# EAGLE board ADC_Memoria (EAGLE 9.5.2)
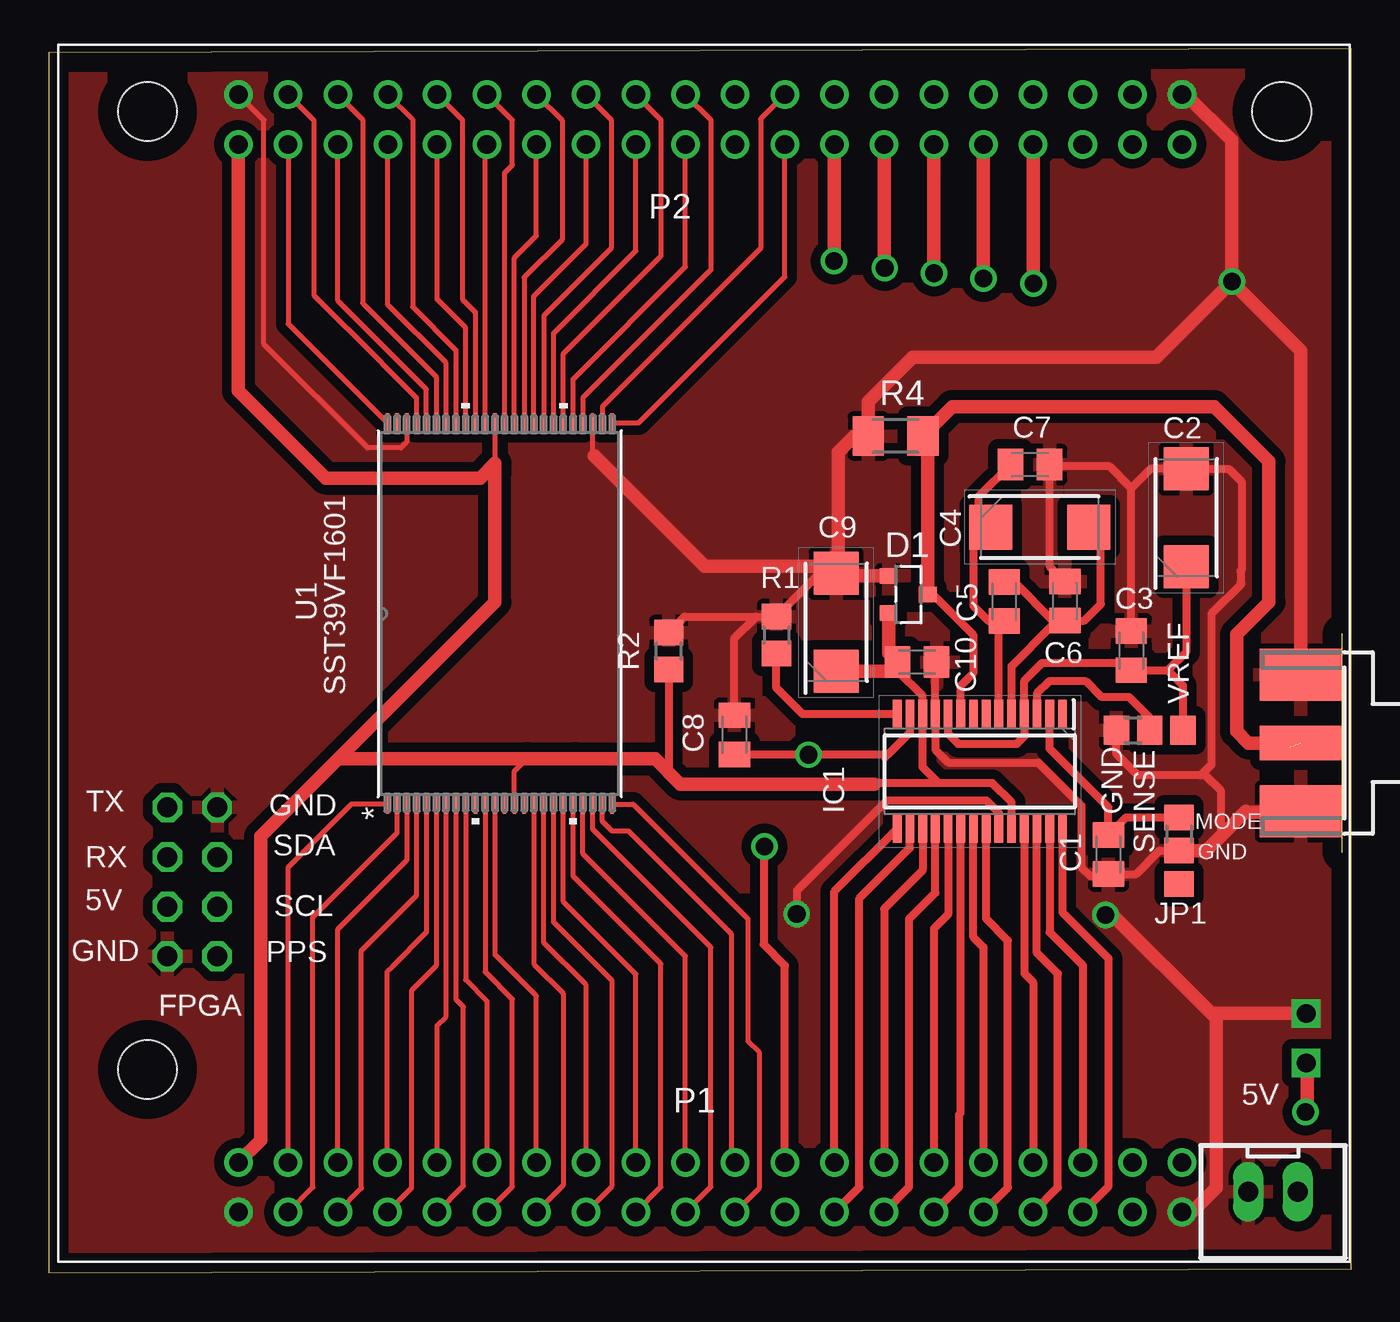
[diagram p0: board, top side]
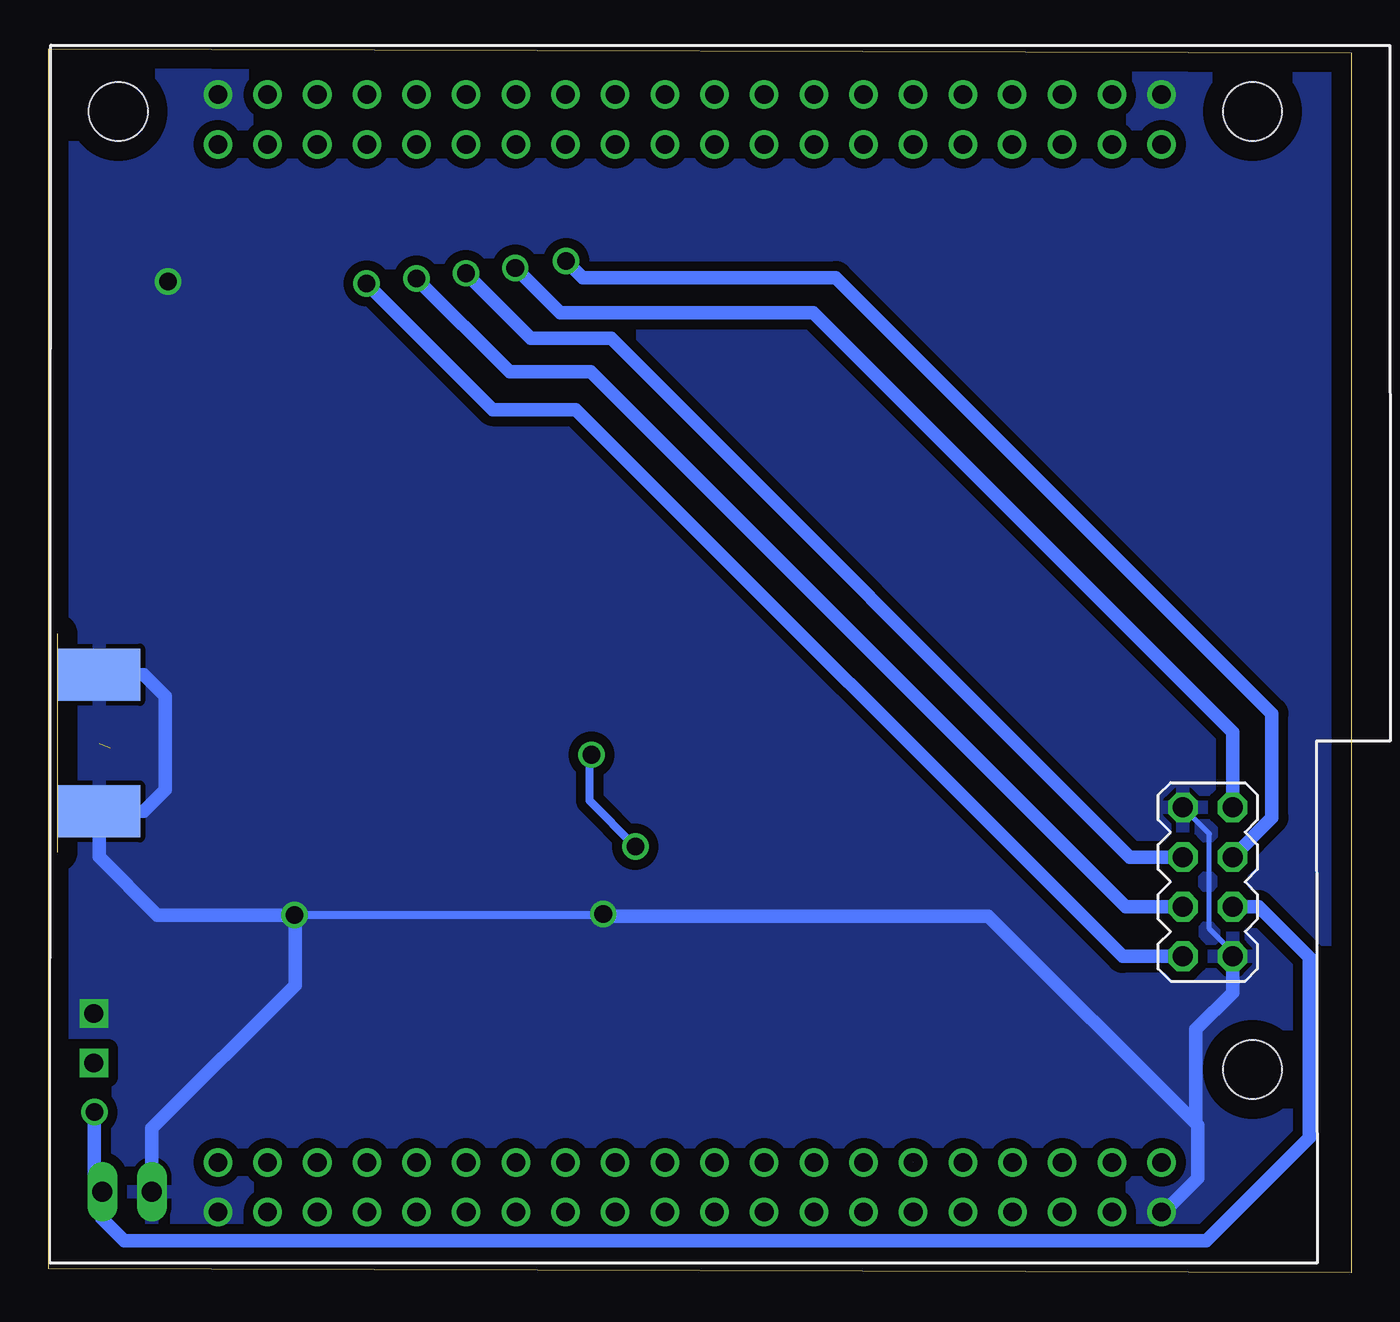
[diagram p1: board, bottom side, seen from below]

Size 66.6 x 62.6 mm. Coordinates in mm from the lower left corner, seen from the top.
Outline: 0,0 66.6,0.2 66.6,62.6 0,62.4 0,0
Copper layers (1*16): Top 0.035mm / dielectric 1.5mm / Bottom 0.035mm
Design rules "default": minimum track width 6mil, minimum drill 0.35mm, track to track 6mil, track to pad 6mil, pad to pad 6mil, via to via 6mil, smd to smd 6mil, copper to edge 40mil, drill to drill 6mil, minimum pad ring 10mil, minimum via ring 8mil, stop-mask expansion 4mil, vias tented up to drill 0mil, thermal gap 10mil

## Footprints (pad centres in the part's own frame; a part is rotated, then mirrored left to right if it is on the bottom)
C0805K = smd 1.3 x 1.6: 1 -1,0; 2 1,0
CAPPM6032X280N = smd 2.2 x 2.3: 1 -2.5,0; 2 2.5,0
PIN_DIODE_287T = smd 0.8 x 0.9: B -0.95,-1; O 0,1; T 0.95,-1
A0R-JMP = smd 1.5 x 1.3: 1 0,1.7; 2 0,0; 3 0,-1.7
SOP65P638X110-28N = smd 1.45 x 0.45: 1 -2.925,4.225; 2 -2.925,3.575; 3 -2.925,2.925; 4 -2.925,2.275; 5 -2.925,1.625; 6 -2.925,0.975; 7 -2.925,0.325; 8 -2.925,-0.325; 9 -2.925,-0.975; 10 -2.925,-1.625; 11 -2.925,-2.275; 12 -2.925,-2.925; 13 -2.925,-3.575; 14 -2.925,-4.225; 15 2.925,-4.225; 16 2.925,-3.575; 17 2.925,-2.925; 18 2.925,-2.275; 19 2.925,-1.625; 20 2.925,-0.975; 21 2.925,-0.325; 22 2.925,0.325; 23 2.925,0.975; 24 2.925,1.625; 25 2.925,2.275; 26 2.925,2.925; 27 2.925,3.575; 28 2.925,4.225
R0805 = smd 1.3 x 1.5: 1 -0.95,0; 2 0.95,0
M1206 = smd 1.6 x 2: 1 -1.4,0; 2 1.4,0
J502-ND-142-0711-821/826 = smd 4.191 x 1.778: 1 2.115,0 | smd 4.191 x 2.667: G@1 2.115,3.495; G@2 2.115,-3.495 | smd 4.191 x 2.667 bottom: G@3 2.115,3.495; G@4 2.115,-3.495
TSOP48_EKE_SST-L = smd 1.003 x 0.178: 1 -9.747,5.75; 2 -9.747,5.25; 3 -9.747,4.75; 4 -9.747,4.25; 5 -9.747,3.75; 6 -9.747,3.25; 7 -9.747,2.75; 8 -9.747,2.25; 9 -9.747,1.75; 10 -9.747,1.25; 11 -9.747,0.75; 12 -9.747,0.25; 13 -9.747,-0.25; 14 -9.747,-0.75; 15 -9.747,-1.25; 16 -9.747,-1.75; 17 -9.747,-2.25; 18 -9.747,-2.75; 19 -9.747,-3.25; 20 -9.747,-3.75; 21 -9.747,-4.25; 22 -9.747,-4.75; 23 -9.747,-5.25; 24 -9.747,-5.75; 25 9.747,-5.75; 26 9.747,-5.25; 27 9.747,-4.75; 28 9.747,-4.25; 29 9.747,-3.75; 30 9.747,-3.25; 31 9.747,-2.75; 32 9.747,-2.25; 33 9.747,-1.75; 34 9.747,-1.25; 35 9.747,-0.75; 36 9.747,-0.25; 37 9.747,0.25; 38 9.747,0.75; 39 9.747,1.25; 40 9.747,1.75; 41 9.747,2.25; 42 9.747,2.75; 43 9.747,3.25; 44 9.747,3.75; 45 9.747,4.25; 46 9.747,4.75; 47 9.747,5.25; 48 9.747,5.75
SPARTAN_NO_HOLES = drill 0.95 pad 1.3 square: 5V_E 60.325,-48.26; GND_E 60.325,-45.72 | drill 0.95 pad 1.3: P1_03 51.435,-53.34; P1_04 51.435,-55.88; P1_05 48.895,-53.34; P1_06 48.895,-55.88; P1_07 46.355,-53.34; P1_08 46.355,-55.88; P1_09 43.815,-53.34; P1_10 43.815,-55.88; P1_11 41.275,-53.34; P1_12 41.275,-55.88; P1_13 38.735,-53.34; P1_14 38.735,-55.88; P1_15 36.195,-53.34; P1_16 36.195,-55.88; P1_17 33.655,-53.34; P1_18 33.655,-55.88; P1_19 31.115,-53.34; P1_20 31.115,-55.88; P1_21 28.575,-53.34; P1_22 28.575,-55.88; P1_23 26.035,-53.34; P1_24 26.035,-55.88; P1_25 23.495,-53.34; P1_26 23.495,-55.88; P1_27 20.955,-53.34; P1_28 20.955,-55.88; P1_29 18.415,-53.34; P1_30 18.415,-55.88; P1_31 15.875,-53.34; P1_32 15.875,-55.88; P1_33 13.335,-53.34; P1_34 13.335,-55.88; P1_35 10.795,-53.34; P1_36 10.795,-55.88; P1_37 8.255,-53.34; P1_38 8.255,-55.88; P1_GND 53.975,-55.88; P1_GND1 5.715,-55.88; P1_VCC 53.975,-53.34; P1_VCC1 5.715,-53.34; P2_03 51.435,1.27; P2_04 51.435,-1.27; P2_05 48.895,1.27; P2_06 48.895,-1.27; P2_07 46.355,1.27; P2_08 46.355,-1.27; P2_09 43.815,1.27; P2_10 43.815,-1.27; P2_11 41.275,1.27; P2_12 41.275,-1.27; P2_13 38.735,1.27; P2_14 38.735,-1.27; P2_15 36.195,1.27; P2_16 36.195,-1.27; P2_17 33.655,1.27; P2_18 33.655,-1.27; P2_21 28.575,1.27; P2_22 28.575,-1.27; P2_23 26.035,1.27; P2_24 26.035,-1.27; P2_25 23.495,1.27; P2_26 23.495,-1.27; P2_27 20.955,1.27; P2_28 20.955,-1.27; P2_29 18.415,1.27; P2_30 18.415,-1.27; P2_31 15.875,1.27; P2_32 15.875,-1.27; P2_33 13.355,1.27; P2_34 13.355,-1.27; P2_35 10.795,1.27; P2_36 10.795,-1.27; P2_37 8.255,1.27; P2_38 8.255,-1.27; P2_GND 53.975,1.27; P2_GND1 5.715,1.27; P2_GND19 31.115,1.27; P2_GND20 31.115,-1.27; P2_VCC 53.975,-1.27; P2_VCC1 5.715,-1.27
CAPA1 = drill 1.016 octagon: 5V 60.738,18.927; GND 58.198,24.007; GND2 60.738,16.387; PPS 58.198,16.387; RX2PI 60.738,21.467; SCL 58.198,18.927; SDA 58.198,21.467; TX2PI 60.738,24.007 | hole 3: 61.75,10.6; 61.75,59.6; 3.75,59.6
JST-XH-02-PACKAGE-LONG-PAD = drill 1.016 long: 1 -1.27,0; 2 1.27,0

## Placement (x,y rotation side)
C1  0.1uF  [C0805K]  54.19,21.4 270 top
C2  10uF  [CAPPM6032X280N]  58.16,38.62 90 top
C3  0.1uF  [C0805K]  55.36,31.82 90 top
C4  10uF  [CAPPM6032X280N]  50.68,38.14 0 top
C5  0.1uF  [C0805K]  48.86,34.34 90 top
C6  0.1uF  [C0805K]  51.96,34.36 90 top
C7  0.1uF  [C0805K]  50.18,41.34 0 top
C8  15pF  [C0805K]  35.06,27.52 90 top
C9  10uF  [CAPPM6032X280N]  40.26,33.27 90 top
C10  0.1uF  [C0805K]  44.4,31.24 0 top
D1  PIN_DIODE_287T  [PIN_DIODE_287T]  43.95,34.7 270 top
GND-SEN-VREF  JP2  [A0R-JMP]  56.3,27.75 90 top
IC1  AD9235  [SOP65P638X110-28N]  47.61,25.65 270 top
JP1  GND MODE  [A0R-JMP]  57.8,21.6 0 top
R1  5k  [R0805]  37.21,32.62 270 top
R2  10k  [R0805]  31.7,31.8 90 top
R4  50  [M1206]  43.3,42.8 0 top
SMA  SIGNAL  [J502-ND-142-0711-821/826]  66.15,27.1 180 top
U1  SST39VF1601  [TSOP48_EKE_SST-L]  23.06,33.72 90 top
U$1  SPARTAN_NO_HOLES  [SPARTAN_NO_HOLES]  3.98,58.99 0 top
U$2  CAPA1  [CAPA1]  66.8,-0.2 0 bottom
V_EXT  V_Ext  [JST-XH-02-PACKAGE-LONG-PAD]  62.6,4.15 180 top

## Library data of the parts
C1 C3 C5-C8 C10 = rcl; SPICEPREFIX: C
C2 C4 C9 = TAN_Capacitor_2312_10UF; DESCRIPTION: Tantalum Capacitors - Solid SMD 35V 10uF 10% 2312 ESR = 1 Ohms; HEIGHT: 2.8mm; MANUFACTURER_NAME: AVX; MANUFACTURER_PART_NUMBER: TAJC106K035RNJV; MOUSER_PART_NUMBER: 581-TAJC106K035RNJV; MOUSER_PRICE-STOCK: https://www.mouser.com/Search/Refine.aspx?Keyword=581-TAJC106K035RNJV
D1 = PIN_DIODE_287T
GND-SEN-VREF JP1 = jump-0r-smd
IC1 = AD9235BRUZ-65; DESCRIPTION: AD9235BRUZ-65, 12 bit ADC Differential,, Parallel, 28-Pin TSSOP; HEIGHT: 1.1mm; MANUFACTURER_NAME: Analog Devices; MANUFACTURER_PART_NUMBER: AD9235BRUZ-65; MOUSER_PART_NUMBER: 584-AD9235BRUZ-65; MOUSER_PRICE-STOCK: https://www.mouser.com/Search/Refine.aspx?Keyword=584-AD9235BRUZ-65
R1 R2 R4 = rcl; SPICEPREFIX: R
SMA = con-coax; MF: JOHNSON COMPONENTS; MPN: 142-0711-821; OC_FARNELL: 1019328; OC_NEWARK: 16F3627
U1 = Memoria_SST39VF1601C; BUILT_BY: EMA_UL_Team; MANUFACTURER_PART_NUMBER: sst39vf1601-70-4c-eke; VENDOR: Microchip
U$1 = SPARTAN_6_NIMAS
U$2 = CAPA1
V_EXT = Connectors JST XH

## Nets
5V: U$1.5V_E U$2.5V V_EXT.1
A0: U1.25 U$1.P2_18
A1: U1.24 U$1.P1_20
A2: U1.23 U$1.P1_19
A3: U1.22 U$1.P1_22
A4: U1.21 U$1.P1_21
A5: U1.20 U$1.P1_24
A6: U1.19 U$1.P1_23
A7: U1.18 U$1.P1_26
A8: U1.8 U$1.P1_32
A9: U1.7 U$1.P1_31
A10: U1.6 U$1.P1_34
A11: U1.5 U$1.P1_33
A12: U1.4 U$1.P1_36
A13: U1.3 U$1.P1_35
A14: U1.2 U$1.P1_38
A15: U1.1 U$1.P1_37
A16: U1.48 U$1.P2_38
A17: U1.17 U$1.P1_25
A18: U1.16 U$1.P1_28
A19: U1.9 U$1.P1_29
AVDD: C9.1 C10.1 D1.T IC1.12 IC1.24 R2.1 U1.14 U1.37 U$1.P1_VCC1 U$1.P2_VCC1
CE: U1.26 U$1.P2_17
CLK: C8.1 IC1.13 U$1.P1_17
D0: IC1.15 U$1.P1_15
D1: IC1.16 U$1.P1_16
D2: IC1.17 U$1.P1_13
D3: IC1.18 U$1.P1_14
D4: IC1.19 U$1.P1_11
D5: IC1.20 U$1.P1_12
D6: IC1.21 U$1.P1_09
D7: IC1.22 U$1.P1_10
D8: IC1.25 U$1.P1_07
D9: IC1.26 U$1.P1_08
D10: IC1.27 U$1.P1_05
D11: IC1.28 U$1.P1_06
DQ0: U1.29 U$1.P2_22
DQ1: U1.31 U$1.P2_24
DQ2: U1.33 U$1.P2_26
DQ3: U1.35 U$1.P2_28
DQ4: U1.38 U$1.P2_30
DQ5: U1.40 U$1.P2_32
DQ6: U1.42 U$1.P2_34
DQ7: U1.44 U$1.P2_36
DQ8: U1.30 U$1.P2_23
DQ9: U1.32 U$1.P2_25
DQ10: U1.34 U$1.P2_27
DQ11: U1.36 U$1.P2_29
DQ12: U1.39 U$1.P2_31
DQ13: U1.41 U$1.P2_33
DQ14: U1.43 U$1.P2_35
DQ15: U1.45 U$1.P2_37
GND: C1.2 C2.2 C3.2 C6.2 C7.2 C8.2 C9.2 C10.2 D1.B GND-SEN-VREF.1 IC1.11 IC1.23 JP1.2 R1.1 R2.2 R4.1 SMA.G@1 SMA.G@2 SMA.G@3 SMA.G@4 U1.27 U1.46 U$1.GND_E U$1.P1_GND U$1.P1_GND1 U$1.P2_GND U$1.P2_GND1 U$2.GND U$2.GND2 V_EXT.2
MODE: C1.1 IC1.2 JP1.1
N$1: IC1.7
N$2: IC1.8
N$5: U$1.P1_03
N$13: IC1.14 R1.2
N$18: U$1.P1_04
OE: U1.28 U$1.P2_21
PPS: U$1.P2_08 U$2.PPS
REFB: C4.2 C5.2 C6.1 IC1.5
REFT: C4.1 C5.1 C7.1 IC1.6
RST: U1.12 U$1.P1_27
RX: U$1.P2_16 U$2.RX2PI
SCL: U$1.P2_10 U$2.SCL
SDA: U$1.P2_12 U$2.SDA
SENSE: GND-SEN-VREF.2 IC1.3
TX: U$1.P2_14 U$2.TX2PI
VIN: D1.O IC1.9 R4.2 SMA.1
VREF: C2.1 C3.1 GND-SEN-VREF.3 IC1.4 IC1.10
WE: U1.11 U$1.P1_30

## Tracks (layer width: path | path; a pad name or v marks a point on that pad's centre or on a via)
5V  (via drill 0.9)
  Top 0.7: U$1.5V_E 64.36,10.68 64.36,8.26 64.3,8.2 v64.28,8.23
  Bottom 0.7: U$2.5V 4.73,18.73 2.15,16.15 2.15,6.9 7.4,1.65 62.75,1.65 63.9,2.8 63.87,2.83 V_EXT.1 64.28,4.55 v64.28,8.23
A0
  Top 0.25: U1.25 30.17,43.47 37.63,50.93 U$1.P2_18
A1
  Top 0.25: U1.24 29.88,23.97 35.75,18.1 35.75,11.85 36.35,11.25 36.35,4.37 U$1.P1_20
A2
  Top 0.25: U$1.P1_19 34.89,5.85 34.89,17.36 29.65,22.6 28.8,22.6 28.31,23.09 U1.23
A3
  Top 0.25: U$1.P1_22 33.85,4.41 33.85,16.65 27.81,22.69 U1.22
A4
  Top 0.25: U$1.P1_21 32.55,16.2 27.31,21.44 U1.21
A5
  Top 0.25: U$1.P1_24 31.3,4.39 31.3,15.8 26.81,20.29 U1.20
A6
  Top 0.25: U$1.P1_23 30.01,15.29 26.31,18.99 U1.19
A7
  Top 0.25: U$1.P1_26 28.8,4.43 28.8,14.95 25.81,17.94 U1.18
A8
  Top 0.25: U1.8 20.81,13.99 21.2,13.6 21.2,4.46 U$1.P1_32
A9
  Top 0.25: U1.7 20.31,13.11 19.85,12.66 U$1.P1_31
A10
  Top 0.25: U1.6 19.81,15.71 18.55,14.45 18.55,4.35 U$1.P1_34
A11
  Top 0.25: U1.5 19.31,17.41 17.55,15.65 17.31,15.41 U$1.P1_33
A12
  Top 0.25: U1.4 18.81,19.31 15.98,16.48 15.98,4.35 15.98,4.32 U$1.P1_36
A13
  Top 0.25: U1.3 18.31,21.11 14.78,17.57 U$1.P1_35
A14
  Top 0.25: U1.2 17.81,22.51 13.5,18.2 13.5,4.38 U$1.P1_38
A15
  Top 0.25: U1.1 15.47,23.97 12.24,20.73 U$1.P1_37
A16
  Top 0.25: U1.48 12.24,48.54 U$1.P2_38
A17
  Top 0.25: U$1.P1_25 27.47,14.73 25.31,16.89 U1.17
A18
  Top 0.25: U$1.P1_28 26.3,4.47 26.3,14.3 24.81,15.79 U1.16
A19  (1 unrouted)
  Top 0.25: U1.9 21.31,14.99 22.4,13.9 U$1.P1_29
AVDD
  Top 0.25: 26.4,26.3 25.1,26.3 | U1.14 23.81,25.66 24.45,26.3 | U1.37 22.81,40.9
  Top 0.4: 43.02,31.62 C10.1 43.4,30.8 44.68,29.52 IC1.12 44.68,25.87 45.5,25.05 | IC1.24 49.23,24.07 48.25,25.05 45.5,25.05 | 42.2,25 42.25,25.05 45.5,25.05 | 26.9,26.3 26.4,26.3 | 10.9,9.85 10.83,9.78 10.83,21.85 | 14.8,26.3 14.65,26.15 | R2.1 31.7,25.6 32.27,25.03
  Top 0.7: 42.2,25 32.3,25 32.27,25.03 31,26.3 26.9,26.3 24.45,26.3 14.8,26.3 22.81,34.31 22.81,40.9 22.81,41.41 22.05,40.65 14.15,40.65 9.7,45.1 U$1.P2_VCC1 | 14.65,26.15 10.83,22.32 10.83,21.85 10.83,6.78 U$1.P1_VCC1 | D1.T 42.95,31.69 C10.1 42.93,30.77 C9.1
CE
  Top 0.25: U$1.P2_17 36.4,59.02 36.4,52.4 28.31,44.31 U1.26
CLK  (via drill 0.9 pad 1.2)
  Top 0.4: IC1.13 44.03,27.64 42.9,26.5 | 42.9,26.5 42.76,26.36 | 42.9,26.5 v38.85,26.5 35.08,26.5 C8.1 | v36.6,21.8 36.55,21.75 36.55,16.8 37.63,15.71 U$1.P1_17
  Bottom 0.4: v36.6,21.8 38.95,24.15 38.95,26.55 38.9,26.55 v38.85,26.5
D0
  Top 0.4: IC1.15 40.17,19.52 U$1.P1_15
D1
  Top 0.4: IC1.16 44.03,21.73 41.45,19.15 41.45,4.38 U$1.P1_16
D2
  Top 0.4: IC1.17 44.68,20.59 42.71,18.62 U$1.P1_13
D3
  Top 0.4: IC1.18 45.34,19.44 44,18.1 44,4.39 U$1.P1_14
D4
  Top 0.4: IC1.19 45.98,18.34 45.25,17.61 U$1.P1_11
D5
  Top 0.4: IC1.20 46.63,8.19 46.55,8.1 46.55,4.41 U$1.P1_12
D6
  Top 0.4: IC1.21 47.28,17.16 47.8,16.66 U$1.P1_09
D7
  Top 0.4: IC1.22 47.93,18.12 49.05,17 49.05,4.37 U$1.P1_10
D8
  Top 0.4: IC1.25 49.88,15.32 50.34,14.87 U$1.P1_07
D9
  Top 0.4: IC1.26 50.53,16.37 51.6,15.3 51.6,4.38 U$1.P1_08
D10
  Top 0.4: IC1.27 51.18,17.41 52.88,15.73 U$1.P1_05
D11
  Top 0.4: IC1.28 51.84,18.44 54.2,16.08 54.2,4.43 U$1.P1_06
DQ0
  Top 0.25: U1.29 26.81,45.71 32.55,51.45 U$1.P2_22
DQ1
  Top 0.25: U1.31 25.81,48.06 30.01,52.27 U$1.P2_24
DQ2
  Top 0.25: U1.33 24.81,49.96 27.47,52.62 U$1.P2_26
DQ3
  Top 0.25: U1.35 23.81,51.91 24.93,53.03 U$1.P2_28
DQ4
  Top 0.25: U1.38 22.31,57.63 U$1.P2_30
DQ5
  Top 0.25: U1.40 21.31,48.34 19.85,49.79 U$1.P2_32
DQ6
  Top 0.25: U1.42 20.31,46.54 17.33,49.52 U$1.P2_34
DQ7
  Top 0.25: U1.44 19.31,45.19 14.78,49.72 U$1.P2_36
DQ8
  Top 0.25: U1.30 26.31,47.01 31.3,52 31.3,58.97 U$1.P2_23
DQ9
  Top 0.25: U$1.P2_25 28.75,58.98 28.75,52.4 25.31,48.96 U1.32
DQ10
  Top 0.25: U$1.P2_27 26.25,58.95 26.25,52.85 24.31,50.91 U1.34
DQ11
  Top 0.25: U$1.P2_29 23.7,58.95 23.7,56.65 23.31,56.26 U1.36
DQ12
  Top 0.25: U1.39 21.81,49.14 21.15,49.8 21.15,58.96 U$1.P2_31
DQ13
  Top 0.25: U1.41 20.81,47.19 18.6,49.4 18.6,58.99 U$1.P2_33
DQ14
  Top 0.25: U$1.P2_35 16.05,58.98 16.05,49.6 19.81,45.84 U1.43
DQ15
  Top 0.25: U1.45 18.81,44.74 15.28,48.27 15.2,48.35 13.55,50 13.55,58.95 U$1.P2_37
GND  (via drill 0.9, 0.9 pad 1.2)
  Top 0.25: U1.46 18.31,42.51 18,42.2 16.3,42.2 11,47.5 11,58.95 U$1.P2_GND1 | 27.9,41.8 27.81,41.89 U1.27
  Top 0.4: C6.2 51.2,36.12 51.2,41.2 | C7.2 51.2,41.32 51.2,41.2 | 58.65,41.12 C2.2 | C8.2 35.06,32.46 36.17,33.57 R1.1 | 36.57,33.57 R1.1 | IC1.23 48.59,23.52 47.96,24.15 42.85,24.15 38.25,19.55 v38.25,18.35 | C10.2 45.34,31.18 IC1.11 45.34,26.77 46,26.1 50.6,26.1 52.8,23.9 52.8,20.75 53.25,20.3 54.35,20.3 54.45,20.4 | C3.2 55.36,40.14 | 55.36,40.14 54.25,41.25 51.25,41.25 51.2,41.2 | 54.25,20.4 C1.2 54.45,20.4 | 54.45,20.4 55.6,20.4 56.8,21.6 JP1.2 | 58.9,25.45 59.15,25.45 59.95,24.65 59.95,22.35 60.07,22.48 | 58.9,25.45 55.7,25.45 54.6,26.55 GND-SEN-VREF.1 | 32.47,33.52 R2.2 32.52,33.57 R1.1 | SMA.G@1 61.2,23.61 | C2.2 56.34,41.12 55.36,40.14 | C2.2 60.33,41.12 61,40.45 61,35.95 60.95,35.9 60.95,35.3 61,35.25 59.45,33.7 59.45,26 58.9,25.45 | R1.1 39.29,35.65 40.38,35.65
  Top 0.7: U$1.P1_GND 58.46,3.11 59.7,4.35 59.7,13.02 59.45,13.27 | U$1.P2_GND 58.16,60.26 60.5,57.91 v60.5,50.7 | U$1.GND_E 59.45,13.27 | 59.45,13.27 54.42,18.3 v54.04,18.3 54.04,18.23 54.19,18.38 | v60.5,50.7 56.63,46.83 44.18,46.83 41.9,44.55 R4.1 41.2,42.8 40.38,41.98 40.38,36 | SMA.G@1 64.7,23.61 64.75,23.55 61.26,23.55 61.2,23.61 60.07,22.48 | JP1.2 59.2,21.6 59.95,22.35 | SMA.G@2 64.04,47.16 v60.5,50.7 | D1.B 40.38,35.65 | 40.38,35.65 C9.2 | 40.38,35.65 40.38,36 | 40.38,36 40.23,36.15 33.55,36.15 27.9,41.8
  Bottom 0.25: U$2.GND2 6.25,16.38 6.25,16.61 7.25,17.61 7.25,22.46 U$2.GND
  Bottom 0.4: v38.25,18.35 38.2,18.3 | 38.2,18.3 38.15,18.25 | 38.2,18.3 54,18.3 v54.04,18.3 54.1,18.3 | 63.55,30.6 SMA.G@2
  Bottom 0.7: 7.95,7.65 7.95,12.45 6.06,14.34 U$2.GND2 | 38.15,18.25 18.55,18.25 7.95,7.65 | 7.95,7.65 7.85,7.55 7.85,4.85 9.59,3.11 U$1.P1_GND1 | 64.55,23.65 64.78,23.42 64.78,23.28 | 54,18.3 54,14.72 61.33,7.39 V_EXT.2 | 63.55,30.6 61.74,30.6 60.65,29.5 60.65,24.7 61.74,23.61 SMA.G@1 64.04,21.29 61.05,18.3 v54.04,18.3
  pour Top (isolate 0.5): 0.3,62.9 66.45,62.9 66.45,0.2 0.4,0.2 0.3,0.3
  pour Bottom (isolate 0.5): 0,62.45 66.45,62.55 66.45,0.2 0.15,0.2 0.15,62.45
MODE
  Top 0.4: JP1.1 55.09,23.3 C1.1 54.19,23.81 51.18,26.82 IC1.2
N$13
  Top 0.4: IC1.14 39.35,28.57 39.12,28.57 38.55,28.57 37.21,29.91 R1.2
OE
  Top 0.25: U$1.P2_21 33.85,58.96 33.85,51.3 27.31,44.76 U1.28
PPS  (via drill 0.9)
  Top 0.7: U$1.P2_08 50.34,50.61 v50.35,50.6 50.32,50.57
  Bottom 0.7: U$2.PPS 11.69,16.19 39.65,44.15 40.75,44.15 43.9,44.15 v50.35,50.6
REFB
  Top 0.4: 49.28,35.34 C5.2 49.36,35.34 51.34,33.36 C6.1 | 51.96,33.1 51.96,33.06 51.8,32.9 | 51.96,33.1 C6.1 | C6.1 52.96,33.36 53.8,34.2 53.8,37.25 53.8,37.52 | 53.8,37.52 53.8,38 | 51.96,33.1 51.3,33.1 49.23,31.04 IC1.5 | C4.2 53.8,37.52
REFT
  Top 0.4: IC1.6 48.59,33.06 C5.1 48.06,33.34 47.3,34.1 47.3,37.9 47.54,38.14 | 47.54,38.14 C4.1 | C7.1 47.54,39.7 47.54,38.14
RST
  Top 0.25: U1.12 22.81,16.29 24.93,14.17 U$1.P1_27
RX  (via drill 0.9)
  Top 0.7: U$1.P2_16 40.17,51.77 v40.15,51.75
  Bottom 0.7: U$2.RX2PI 4.05,23.28 4.05,28.6 26.35,50.9 39.3,50.9 v40.15,51.75
SCL  (via drill 0.9)
  Top 0.7: U$1.P2_10 47.8,50.9 v47.8,50.85
  Bottom 0.7: U$2.SCL 11.53,18.73 38.88,46.07 43.02,46.07 v47.8,50.85
SDA  (via drill 0.9)
  Top 0.7: U$1.P2_12 45.25,51.2 45.3,51.15 v45.27,51.12
  Bottom 0.7: U$2.SDA 11.32,21.27 37.85,47.8 41.95,47.8 v45.27,51.12
SENSE
  Top 0.4: IC1.3 50.53,29.64 51.15,30.25 53.05,30.25 53.85,29.45 55.25,29.45 56.3,28.4 GND-SEN-VREF.2
TX  (via drill 0.9)
  Top 0.7: U$1.P2_14 42.71,51.58 42.8,51.5 42.8,51.45 v42.75,51.4
  Bottom 0.7: U$2.TX2PI 6.06,27.66 27.5,49.1 40.45,49.1 v42.75,51.4
VIN  (1 unrouted)
  Top 0.4: IC1.9 46.63,30.04 47.3,30.7 47.3,32.6 45.2,34.7 D1.O
  Top 0.7: 63.4,26.9 63.45,26.85 | D1.O 44.94,42.56 R4.2 46.2,44.3 59.6,44.3 62.4,41.5 62.4,34.3 60.75,32.65 60.75,27.7 61.35,27.1 SMA.1
VREF
  Top 0.4: C2.1 58.33,35.95 | 57.91,36.37 C2.1 | IC1.10 45.98,27.57 46.5,27.05 49.5,27.05 49.88,27.44 IC1.4 49.88,30.29 50.8,31.2 54.98,31.2 C3.1 57.23,30.82 | GND-SEN-VREF.3 58,30.05 57.23,30.82 | C2.1 58.16,31.75 57.23,30.82
WE
  Top 0.25: U1.11 22.31,15.39 23.7,14 23.7,4.42 U$1.P1_30

## Text on the board
tNames: VREF | TX | GND | GND | MODE | SDA | SENSE | GND | RX | 5V | SCL | GND | PPS | FPGA | 5V